# Altium PCB display_shield_pannel.PcbDoc
Units mm, origin at the board's own origin, x right, y up, seen from the top; angles counter-clockwise.
Board outline 185 x 245 mm, 2 copper layers (Top Layer, Bottom Layer), stack 1.57 mm thick; 3 components, 0 nets, 19 pads, 0 vias.
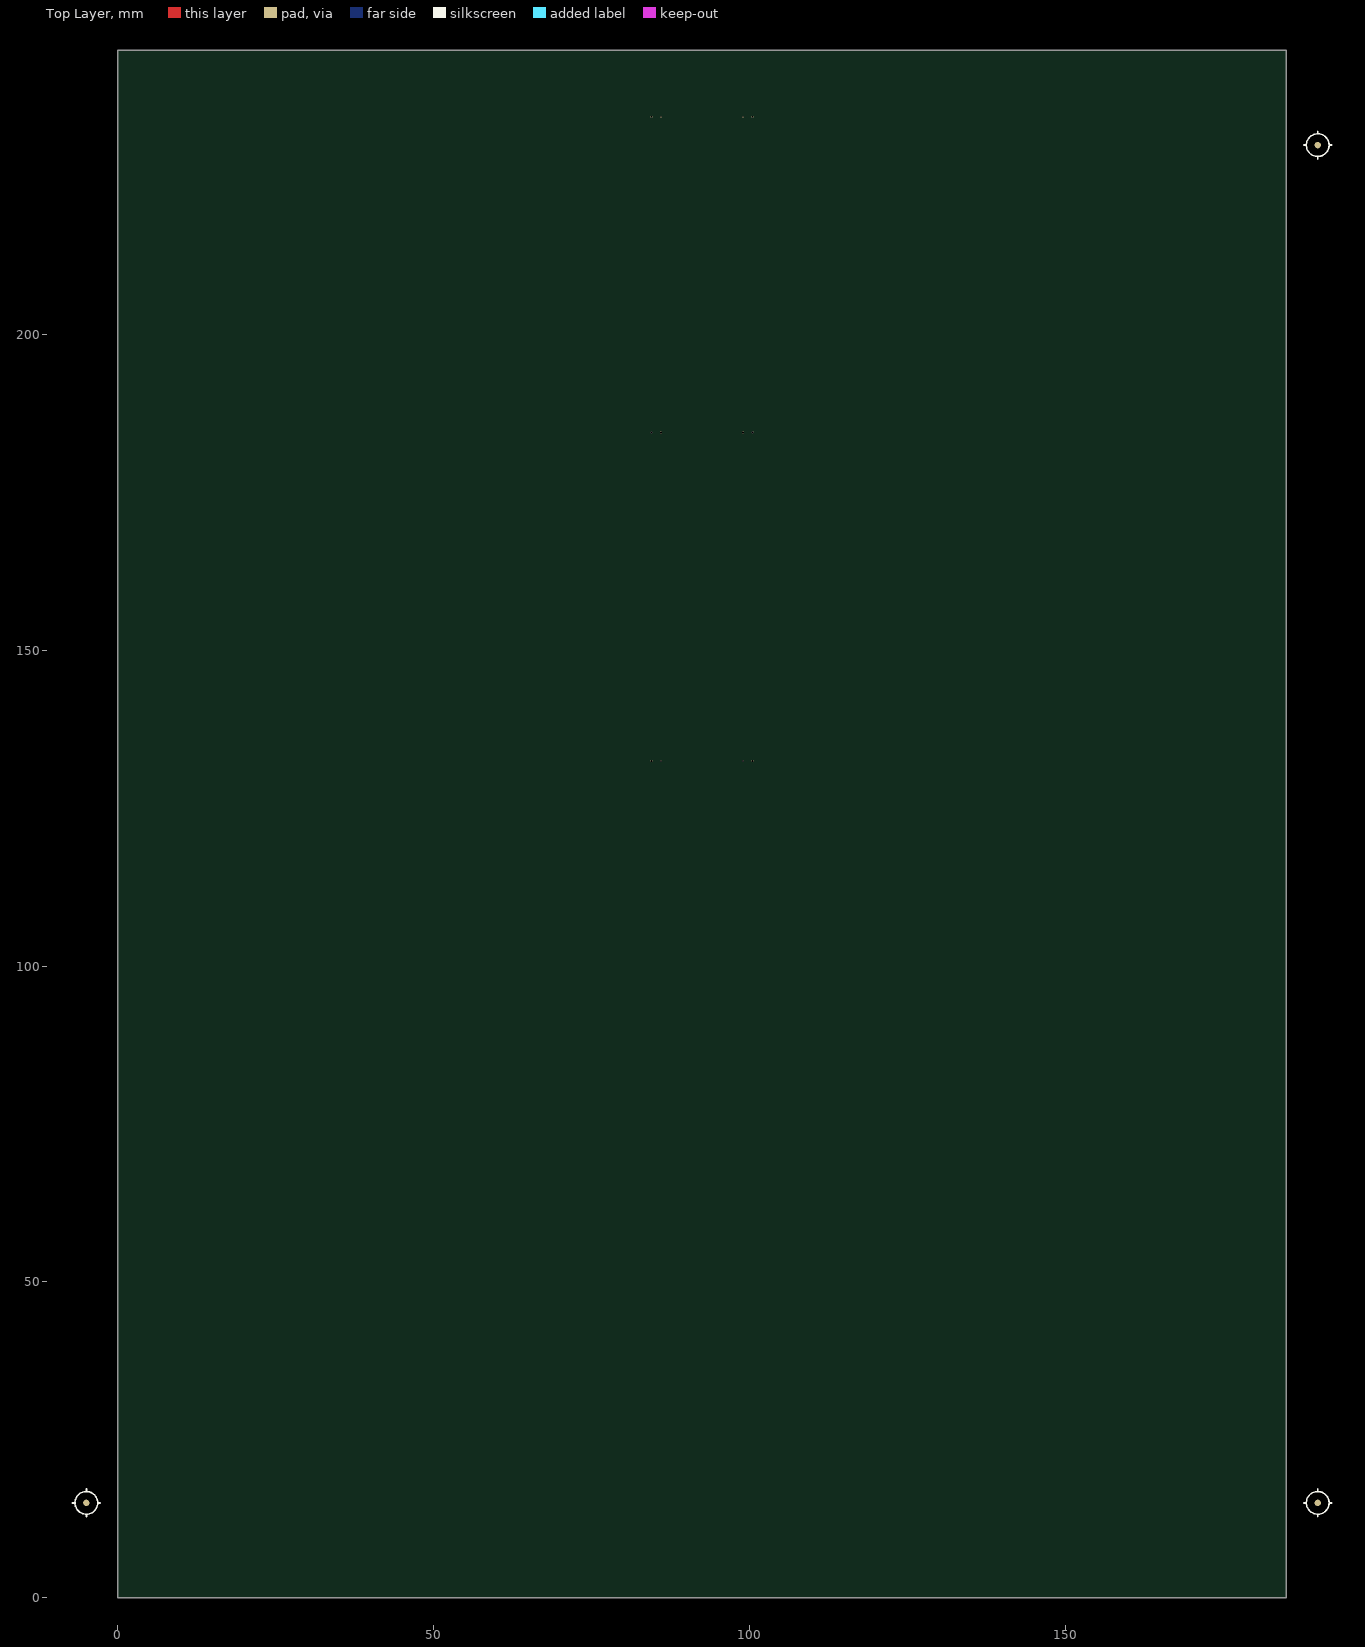
[diagram p0: Top Layer view]
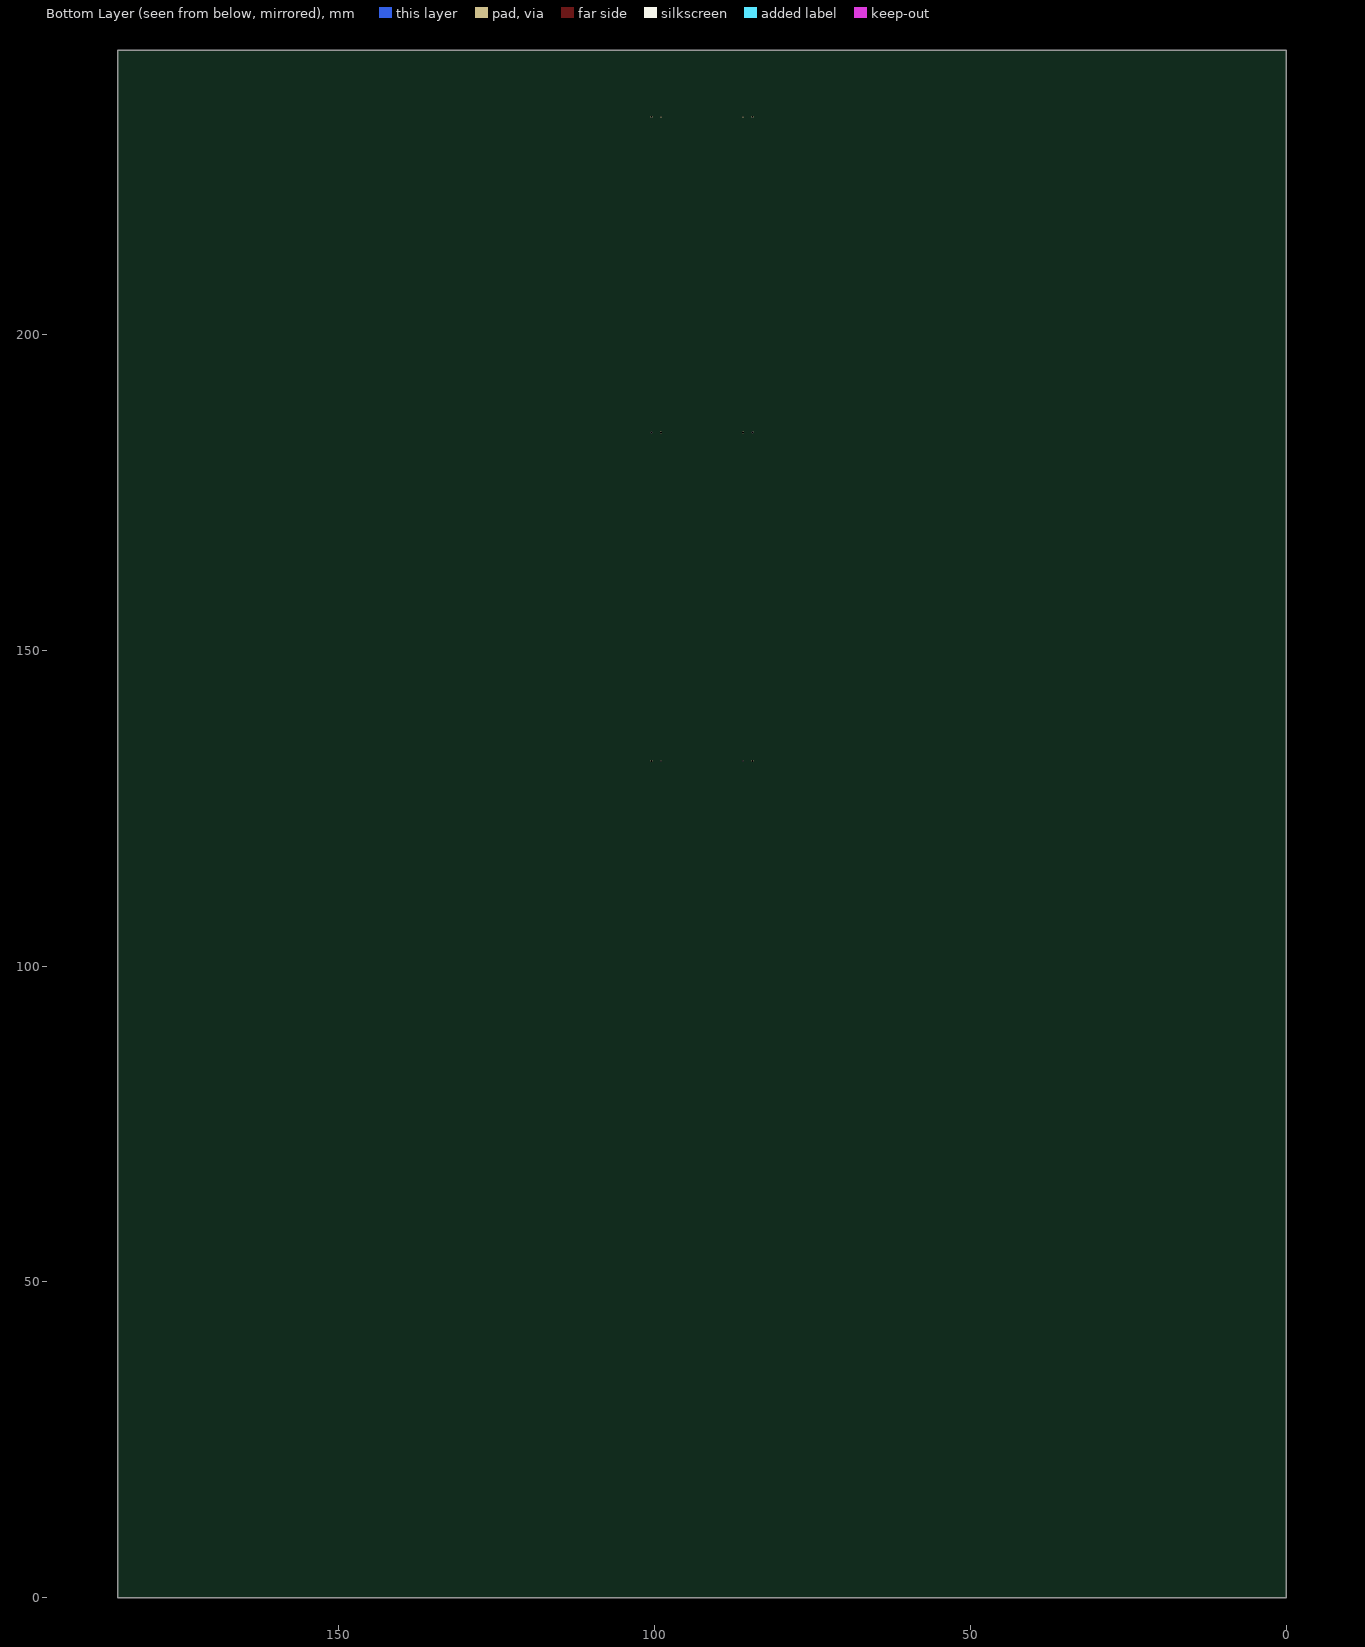
[diagram p1: Bottom Layer view, seen from below]

## Layer stack, top to bottom
Top Solder: solder mask 0.0102, Solder Resist, Dk 3.5
Top Layer: signal copper 0.035
Dielectric1: core 1.5, FR-4, Dk 4.2
Bottom Layer: signal copper 0.035
Bottom Solder: solder mask 0.0102, Solder Resist, Dk 3.5

## Board outline
0,0 185,0 185,245 0,245

## Design rules (kind name [scope] priority, off if disabled: settings)
Clearance [All] p1: gap=0.25
ComponentClearance [All] p1: gap=0.25 collisioncheckmode=3 verticalgap=0.25 showdistances=FALSE
HoleSize [All] p1: absolutevalues=TRUE maxlimit=10 minlimit=0.2 maxpercent=80.000 minpercent=20.000
HoleToHoleClearance [All] p1: gap=0.25 allowstackedmicrovias=TRUE
MinimumSolderMaskSliver [All] p1: minsoldermaskwidth=0.15
PlaneClearance [All] p1: clearance=0.5
PlaneConnect PlaneConnect_via [isvia] p1: planeconnectstyle=Direct reliefexpansion=0.508 reliefentries=4 reliefconductorwidth=0.254 reliefairgap=0.254
PlaneConnect [All] p2: planeconnectstyle=Relief reliefexpansion=0.6 reliefentries=4 reliefconductorwidth=0.35 reliefairgap=0.35
PolygonConnect PolygonConnect_via [isvia] p1: connectstyle=Direct reliefconductorwidth=0.254 reliefentries=4 polygonreliefangle="90 Angle" airgapwidth=0.254
PolygonConnect [All] p2: connectstyle=Relief reliefconductorwidth=0.35 reliefentries=4 polygonreliefangle="90 Angle" airgapwidth=0.6
RoutingVias [All] p1: holewidth=0.3 width=0.6 viastyle="Through Hole" minholewidth=0.2 minwidth=0.35 maxholewidth=0.5 maxwidth=1
SilkToSilkClearance [All] p1: silktosilkclearance=0.1
SilkToSolderMaskClearance [IsPad] p1: minsilkscreentomaskgap=0.15 clearancetoexposedcopper=TRUE
SolderMaskExpansion SolderMaskExpansion_via [isVia] p1: expansion=-10
SolderMaskExpansion [All] p2: expansion=0.05
Width [All] p1: maxlimit=5 minlimit=0.15 preferedwidth=0.25
22 further rules are at their usual default settings.

## Components (designator, comment, footprint, x,y, rotation, side; value= is the part's Value field where it differs from the comment)
? "" Fiducial_mark 190,230 r0 top
? "" Fiducial_mark 190,15 r0 top
? "" Fiducial_mark -5,15 r0 top

## Footprints (in the part's own frame and the unit in brackets; to place one, negate y for a bottom-side part, rotate by r counter-clockwise, add the part's x,y. Pads: shape width x height; smd on the part's side, far side on the other; paste and mask are expansions set on the pad)
Fiducial_mark [mm]
  round 1 smd mask+1: "Fiducial Mark"(0,0)
  Top Layer pour cut-out: 0,-1.8 -0.689,-1.663 -1.273,-1.273 -1.663,-0.689 -1.8,0 -1.8,0 -1.663,0.689 -1.273,1.273 -0.689,1.663 0,1.8 0,1.8 0.689,1.663 1.273,1.273 1.663,0.689 1.8,0 1.8,0 1.663,-0.689 1.273,-1.273 0.689,-1.663 0,-1.8
  silkscreen extent -2.2,-2.2 2.2,2.2

## Free pads (board coordinates)
  round 0.3 hole 0.3 unplated: 0(84.5,234.5) 1(100.5,234.5) 2(99,234.5) 3(86,234.5) 4(84.5,184.5) 5(86,184.5) 6(99,184.5) 7(100.5,184.5) 8(84.5,132.5) 9(86,132.5) 10(99,132.5) 11(100.5,132.5)
  round 0 hole 3.2 unplated: ""(-5,5) ""(-5,240) ""(190,5) ""(190,240)

## Nets (pads, with @x,y where several pads share a name; then routed paths per layer and width w, separated by ;. In a path a pad name is that pad's centre, name@x,y a point inside that pad or via, vN(x,y) a via of type N, cw(c..) or ccw(c..) an arc to the next point about the centre after c; other vN are vias at no path point)
pads on no net: "?.Fiducial Mark"

## Silkscreen, mask and mechanical layers (free items; w line width, h text height)
Outline:
  lines w0.25: -10,0 -10,245 195,245 195,0 -10,0 ; 0,0 185,0 185,245 0,245 0,0
PCB_Note:
  drawing of 249 lines, arcs and shapes, not listed
  text "V-Cut" at -4,254.25 h5
  text "V-Cut" at 172.5,253.75 h5
  text "V-Cut" at -36.5,124 h5
  text "V-Cut" at 221.5,124 h5
  text "Layer" at 270.191,120.191 h2
  text "Name" at 278.864,120.191 h2
  text "Material" at 295.74,120.191 h2
  text "Thickness" at 310.887,120.191 h2
  text "Constant" at 323.366,120.191 h2
  text "Board Layer Stack" at 334.934,120.191 h2
  text "1" at 270.191,116.191 h2
  text "Top Overlay" at 278.864,116.191 h2
  text "2" at 270.191,112.191 h2
  text "Top Solder" at 278.864,112.191 h2
  text "Solder Resist" at 295.74,112.191 h2
  text "0,010mm" at 310.887,112.191 h2
  text "3,5" at 323.366,112.191 h2
  text "3" at 270.191,108.191 h2
  text "Top Layer" at 278.864,108.191 h2
  text "Copper" at 295.74,108.191 h2
  text "0,035mm" at 310.887,108.191 h2
  text "4" at 270.191,104.191 h2
  text "Dielectric1" at 278.864,104.191 h2
  text "FR-4" at 295.74,104.191 h2
  text "1,500mm" at 310.887,104.191 h2
  text "4,2" at 323.366,104.191 h2
  text "5" at 270.191,100.191 h2
  text "Bottom Layer" at 278.864,100.191 h2
  text "Copper" at 295.74,100.191 h2
  text "0,035mm" at 310.887,100.191 h2
  text "6" at 270.191,96.191 h2
  text "Bottom Solder" at 278.864,96.191 h2
  text "Solder Resist" at 295.74,96.191 h2
  text "0,010mm" at 310.887,96.191 h2
  text "3,5" at 323.366,96.191 h2
  text "7" at 270.191,92.191 h2
  text "Bottom Overlay" at 278.864,92.191 h2
  text "File Layer names:" at 301,45.5 h3.5
  text "GTO" at 303,42 h3
  text "Top Overlay" at 312,42 h3
  text "GTP" at 303,39 h3
  text "Top Paste" at 312,39 h3
  text "GTS" at 303,36 h3
  text "Top Solder" at 312,36 h3
  text "GTL" at 303,33 h3
  text "Top Layer" at 312,33 h3
  text "GBL" at 303,30 h3
  text "Bottom Layer" at 312,30 h3
  text "GBS" at 303,27 h3
  text "Bottom Solder" at 312,27 h3
  text "GBP" at 303,24 h3
  text "Bottom Paste" at 312,24 h3
  text "GBO" at 303,21 h3
  text "Bottom Overlay" at 312,21 h3
  text "GM1" at 303,15 h3
  text "Outline" at 312,15 h3
  text "GM7" at 303,12 h3
  text "PCB_Note and Mechanical Info" at 312,12 h3
  text "Board Name" at 293.5,-9.5 h3
  text "Shield Pannel" at 309.5,-9.5 h3
  text "V-Cut" at -6,-11.5 h5
  text "V-Cut" at 180.25,-12 h5
  text "Author" at 293.5,-12.5 h3
  text "Daniele Basile <asterix@develer.com>" at 309.5,-12.5 h3
  text "Date" at 293.5,-15.5 h3
  text "16/06/2016" at 309.5,-15.5 h3
  text "Revision" at 293.5,-18.5 h3
  text "B" at 309.5,-18.5 h3
  text "A3" at 352,-18.5 h3
Drill Drawing:
  circle w0.254: c221.121,65.058 r0.686
  lines w0.254: 220.435,58.202 221.121,58.544 221.807,58.202 221.464,58.887 221.807,59.573 221.121,59.23 220.435,59.573 220.778,58.887 220.435,58.202 ; 220.435,61.63 220.778,61.63 221.121,61.287 221.464,61.63 221.807,61.63 221.464,61.973 221.807,62.315 221.464,62.315 221.121,62.658 220.778,62.315 220.435,62.315 220.778,61.973 220.435,61.63 ; 220.435,67.458 220.435,67.8 220.778,68.143 220.435,68.486 220.435,68.829 220.778,68.829 221.121,68.486 221.464,68.829 221.807,68.829 221.807,68.486 221.464,68.143 221.807,67.8 221.807,67.458 221.464,67.458 221.121,67.8 220.778,67.458 220.435,67.458 ; 220.435,70.886 220.778,70.886 220.778,70.543 221.464,70.543 221.464,70.886 221.807,70.886 221.807,71.572 221.464,71.572 221.464,71.914 220.778,71.914 220.778,71.572 220.435,71.572 220.435,70.886 ; 220.435,75 221.807,75 221.121,73.628 220.435,75 ; 220.435,77.399 221.121,76.714 221.807,77.399 221.121,78.085 220.435,77.399 ; 220.435,79.799 221.807,79.799 221.807,81.171 220.435,81.171 220.435,79.799 ; 220.71,80.073 221.532,80.073 221.532,80.896 220.71,80.896 220.71,80.073
  lines w0.381: 219.19,57.276 353.273,57.276 ; 219.19,81.959 353.273,81.959 ; 227.487,54.191 227.487,85.044 ; 235.099,54.191 235.099,85.044 ; 250.156,54.191 250.156,85.044 ; 256.711,54.191 256.711,85.044 ; 266.085,54.191 266.085,85.044 ; 284.069,54.191 284.069,85.044 ; 291.669,54.191 291.669,85.044 ; 301.607,54.191 301.607,85.044 ; 310.579,54.191 310.579,85.044 ; 321.143,54.191 321.143,85.044 ; 336.943,54.191 336.943,85.044 ; 219.19,54.191 353.273,54.191 353.273,85.044 219.19,85.044 219.19,54.191
  text "Symbol" at 221.042,82.885 h1.83
  text "Count" at 228.412,82.885 h1.83
  text "Hole Size" at 236.024,82.885 h1.83
  text "Plated" at 251.082,82.885 h1.83
  text "Hole Type" at 257.637,82.885 h1.83
  text "Drill Layer Pair" at 267.01,82.885 h1.83
  text "Via/Pad" at 284.994,82.885 h1.83
  text "Pad Shape" at 292.595,82.885 h1.83
  text "Template" at 302.532,82.885 h1.83
  text "Description" at 311.504,82.885 h1.83
  text "Hole Tolerance (+)" at 322.069,82.885 h1.83
  text "Hole Tolerance (-)" at 337.869,82.885 h1.83
  text "2" at 228.412,79.799 h1.52
  text "0,900mm (35,43mil)" at 236.024,79.799 h1.52
  text "PTH" at 251.082,79.799 h1.52
  text "Round" at 257.637,79.799 h1.52
  text "Top Layer - Bottom Layer" at 267.01,79.799 h1.52
  text "Pad" at 284.994,79.799 h1.52
  text "(Mixed)" at 292.595,79.799 h1.52
  text "(Mixed)" at 302.532,79.799 h1.52
  text "2" at 228.412,76.714 h1.52
  text "3,260mm (128,35mil)" at 236.024,76.714 h1.52
  text "PTH" at 251.082,76.714 h1.52
  text "Round" at 257.637,76.714 h1.52
  text "Top Layer - Bottom Layer" at 267.01,76.714 h1.52
  text "Pad" at 284.994,76.714 h1.52
  text "Rounded" at 292.595,76.714 h1.52
  text "c476h326" at 302.532,76.714 h1.52
  text "4" at 228.412,73.628 h1.52
  text "3,200mm (125,98mil)" at 236.024,73.628 h1.52
  text "NPTH" at 251.082,73.628 h1.52
  text "Round" at 257.637,73.628 h1.52
  text "Top Layer - Bottom Layer" at 267.01,73.628 h1.52
  text "Pad" at 284.994,73.628 h1.52
  text "Rounded" at 292.595,73.628 h1.52
  text "c0hn320" at 302.532,73.628 h1.52
  text "6" at 228.412,70.543 h1.52
  text "1,400mm (55,12mil)" at 236.024,70.543 h1.52
  text "PTH" at 251.082,70.543 h1.52
  text "Round" at 257.637,70.543 h1.52
  text "Top Layer - Bottom Layer" at 267.01,70.543 h1.52
  text "Pad" at 284.994,70.543 h1.52
  text "(Mixed)" at 292.595,70.543 h1.52
  text "(Mixed)" at 302.532,70.543 h1.52
  text "9" at 228.412,67.458 h1.52
  text "1,090mm (42,91mil)" at 236.024,67.458 h1.52
  text "PTH" at 251.082,67.458 h1.52
  text "Round" at 257.637,67.458 h1.52
  text "Top Layer - Bottom Layer" at 267.01,67.458 h1.52
  text "Pad" at 284.994,67.458 h1.52
  text "(Mixed)" at 292.595,67.458 h1.52
  text "(Mixed)" at 302.532,67.458 h1.52
  text "12" at 228.412,64.372 h1.52
  text "0,300mm (11,81mil)" at 236.024,64.372 h1.52
  text "NPTH" at 251.082,64.372 h1.52
  text "Round" at 257.637,64.372 h1.52
  text "Top Layer - Bottom Layer" at 267.01,64.372 h1.52
  text "Pad" at 284.994,64.372 h1.52
  text "Rounded" at 292.595,64.372 h1.52
  text "c30hn30" at 302.532,64.372 h1.52
  text "16" at 228.412,61.287 h1.52
  text "3,200mm (125,98mil)" at 236.024,61.287 h1.52
  text "PTH" at 251.082,61.287 h1.52
  text "Round" at 257.637,61.287 h1.52
  text "Top Layer - Bottom Layer" at 267.01,61.287 h1.52
  text "Pad" at 284.994,61.287 h1.52
  text "Rounded" at 292.595,61.287 h1.52
  text "c600h320" at 302.532,61.287 h1.52
  text "461" at 228.412,58.202 h1.52
  text "0,300mm (11,81mil)" at 236.024,58.202 h1.52
  text "PTH" at 251.082,58.202 h1.52
  text "Round" at 257.637,58.202 h1.52
  text "Top Layer - Bottom Layer" at 267.01,58.202 h1.52
  text "Via" at 284.994,58.202 h1.52
  text "Rounded" at 292.595,58.202 h1.52
  text "v60h30" at 302.532,58.202 h1.52
  text "512 Total" at 228.412,55.116 h1.52

## Dimensions
185,245 to 185,0 on PCB_Note
185,245 to -10,245 on PCB_Note

## Panel: embedded boards
"..\shield_display_4.3\shield_display_4.3.PcbDoc" at 84,125, 1 rows x 1 columns, spacing 63.5 x 38.1, rotation 90
"..\shield_display_4.3\shield_display_4.3.PcbDoc" at 185,125, 1 rows x 1 columns, spacing 63.5 x 38.1, rotation 90
"..\shield_can-display\shield_can-display.PcbDoc" at 0,0, 1 rows x 1 columns, spacing 63.5 x 38.1, rotation 0